# Altium PCB PCB1.PcbDoc
Units mil, origin at the board's own origin, x right, y up, seen from the top; angles counter-clockwise.
Board outline 721 x 1489.64 mil, 2 copper layers (Top Layer, Bottom Layer), stack 60.4 mil thick; 26 components, 39 nets, 134 pads, 50 vias.
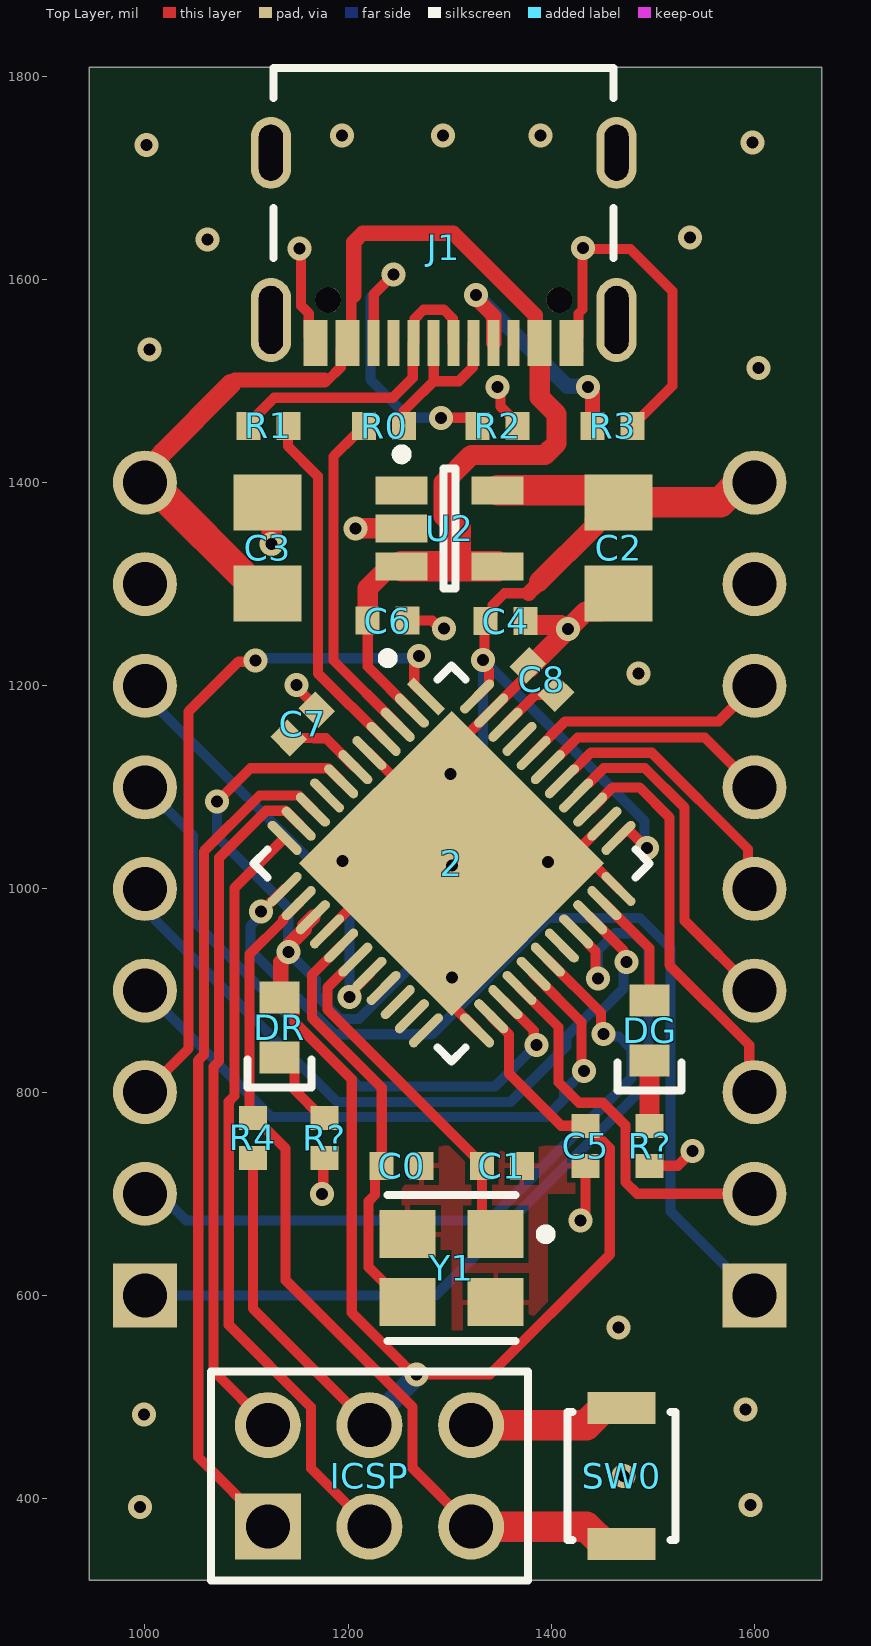
[diagram p0: Top Layer view]
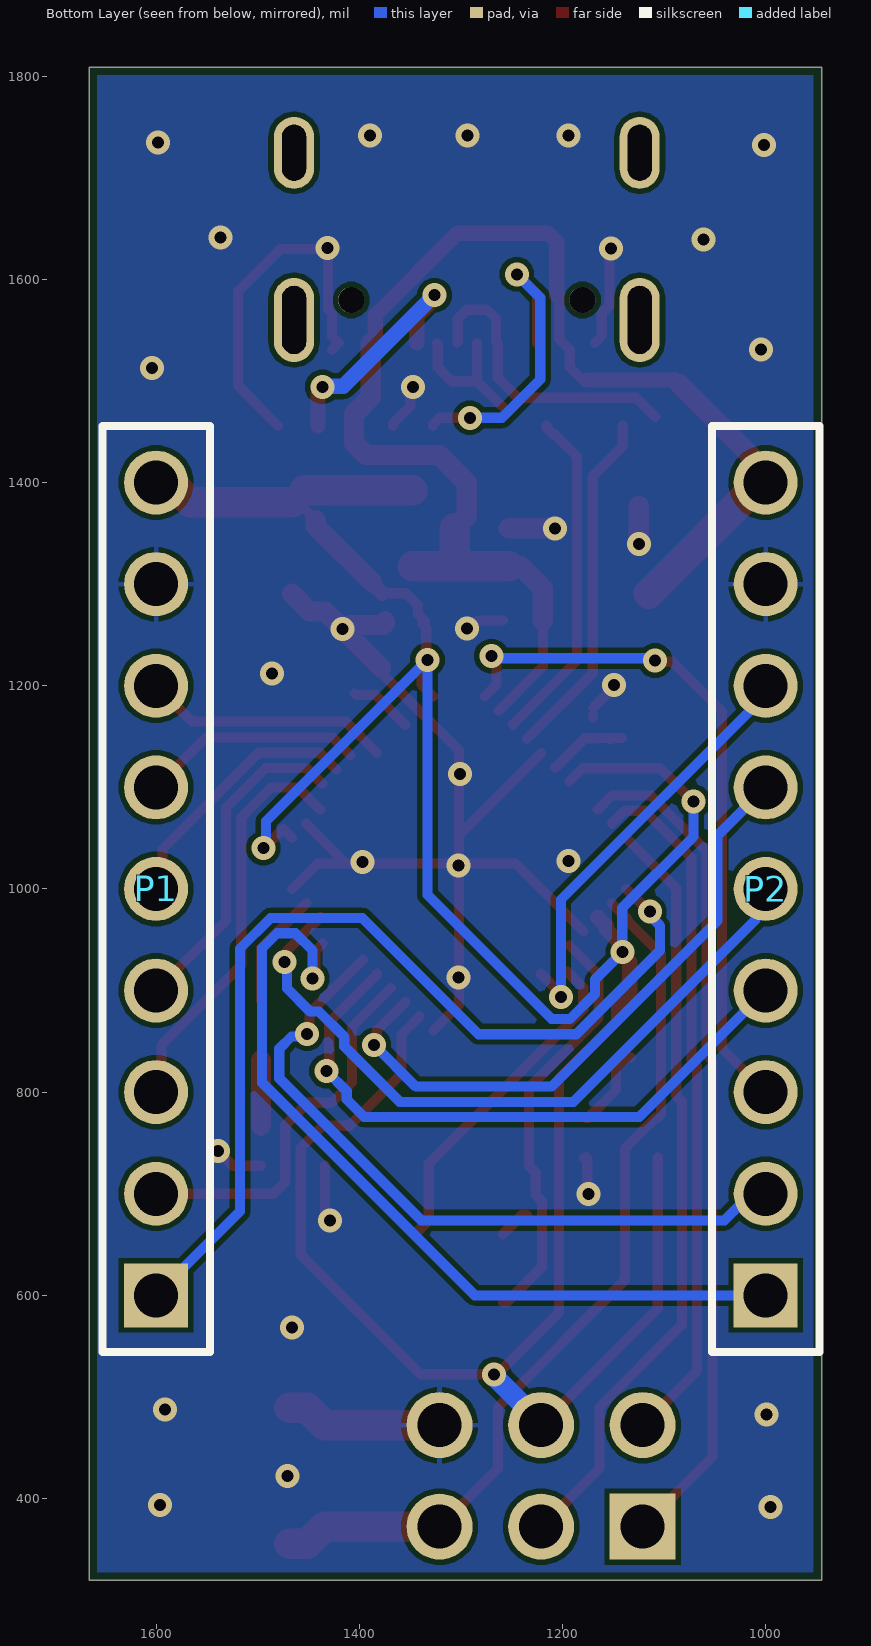
[diagram p1: Bottom Layer view, seen from below]
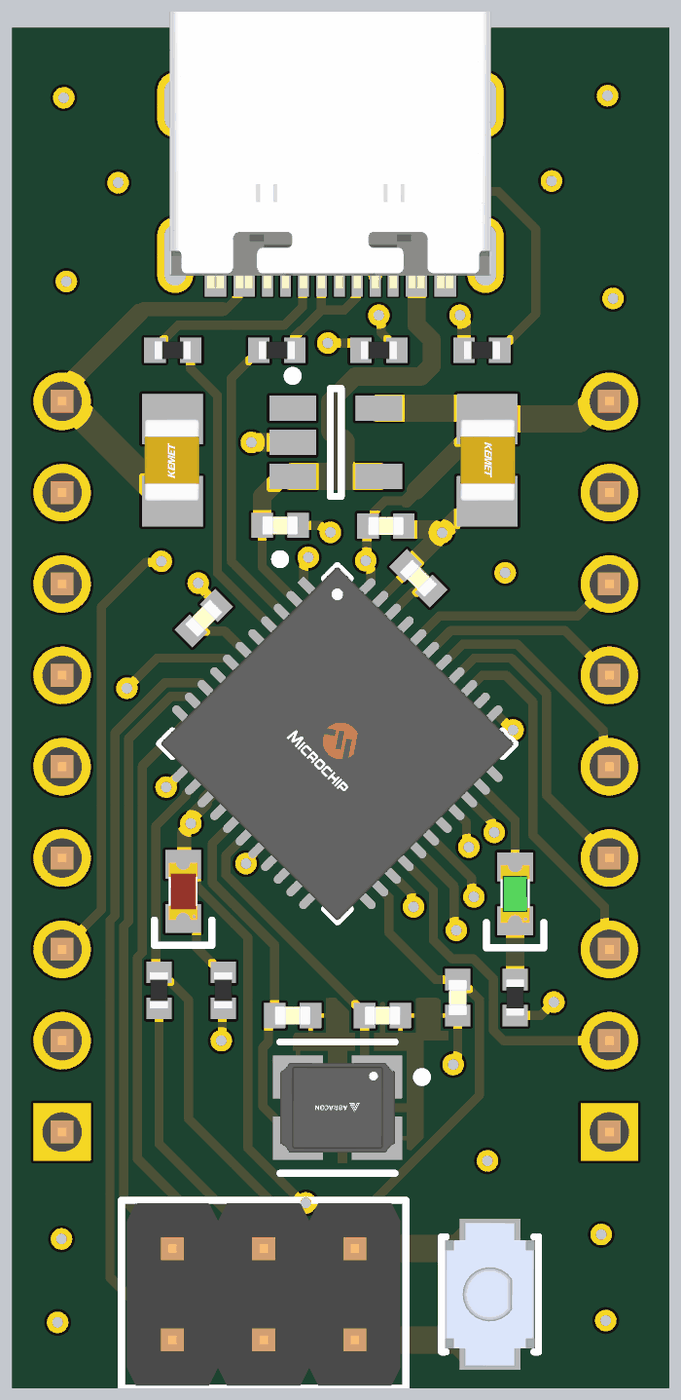
[diagram p2: 3D render of the assembled board from above, using the file's embedded part models]

## Layer stack, top to bottom
Top Solder: solder mask 0.5, Solder Resist, Dk 3.3
Top Layer: signal copper 0.7
Dielectric1: core 59, FR-4, Dk 4.3
Bottom Layer: signal copper 0.7
Bottom Solder: solder mask 0.5, Solder Resist, Dk 3.3

## Board outline
945,319.36 1666,319.36 1666,1809 945,1809

## Design rules (kind name [scope] priority, off if disabled: settings)
BoardOutlineClearance [All] p1: gap=7.87 ignorepadtopadclearanceinfootprint=FALSE
Clearance [All] p1: gap=5 ignorepadtopadclearanceinfootprint=FALSE
ComponentClearance [All] p1: gap=5 collisioncheckmode=3 verticalgap=5 showdistances=TRUE
DiffPairsRouting [All] p1: maxlimit=10 minlimit=5 mostfreqgap=5 toplayer_minwidth=5 toplayer_maxwidth=1000 toplayer_prefwidth=5 bottomlayer_minwidth=5 bottomlayer_maxwidth=1000 bottomlayer_prefwidth=5 maxuncoupledlength=500
Height [All] p1: minheight=0 maxheight=71497.94 prefheight=500
HoleSize [All] p1: absolutevalues=TRUE maxlimit=248.03 minlimit=11.81 maxpercent=80.000 minpercent=20.000
HoleToHoleClearance [All] p1: gap=9.84 allowstackedmicrovias=FALSE
MinimumAnnularRing [All] p1: minimumring=3
MinimumSolderMaskSliver [All] p1: minsoldermaskwidth=0
PlaneClearance [All] p1: clearance=5
PlaneConnect PlaneConnectPowerPads [InPadClass('PowerPads')] p1: planeconnectstyle=Direct reliefexpansion=20 reliefentries=4 reliefconductorwidth=10 reliefairgap=10
PlaneConnect [All] p2: pad.planeconnectstyle=Relief pad.reliefexpansion=11.81 pad.reliefentries=4 pad.reliefconductorwidth=5 pad.reliefairgap=5 via.planeconnectstyle=Direct via.reliefexpansion=11.81 via.reliefentries=4 via.reliefconductorwidth=5 via.reliefairgap=5
PolygonConnect PolygonConnectPowerPads [All vs (InPadClass('PowerPads'))] p1: connectstyle=Direct reliefconductorwidth=10 reliefentries=4 polygonreliefangle="90 Angle" airgapwidth=10
PolygonConnect [All] p2: thpad.connectstyle=Relief thpad.reliefconductorwidth=5 thpad.reliefentries=4 thpad.polygonreliefangle="90 Angle" thpad.airgapwidth=5 smdpad.connectstyle=Relief smdpad.reliefconductorwidth=5 smdpad.reliefentries=4 smdpad.polygonreliefangle="90 Angle" smdpad.airgapwidth=5 via.connectstyle=Direct via.reliefconductorwidth=5 via.reliefentries=4 via.polygonreliefangle="90 Angle" via.airgapwidth=5
RoutingVias [All] p1: holewidth=11.81 width=23.62 viastyle="Through Hole" minholewidth=11.81 minwidth=23.62 maxholewidth=23.62 maxwidth=259.84
SilkToSilkClearance [All] p1: silktosilkclearance=0
SilkToSolderMaskClearance [IsPad] p1: minsilkscreentomaskgap=5 clearancetoexposedcopper=TRUE
SolderMaskExpansion [All] p1: expansion=2.95 istentingtop=FALSE
Width [All] p1: maxlimit=1000 minlimit=10 preferedwidth=10 minimp=50.000000 maximp=50.000000 favimp=50.000000
20 further rules are at their usual default settings.

## Components (designator, comment, footprint, x,y, rotation, side; value= is the part's Value field where it differs from the comment)
2 "ATMEGA32U4RC-MUR" FP-44PW-IPC_A 1301.82,1025.14 r315 top (schematic designator U1)
C0 "22pF" CAP_0402 1252.76,727.5 r180 top
C1 "22pF" CAP_0402 1351.32,727.5 r180 top
C2 "10uF" CAP_0805 1466.16,1335.6 r270 top
C3 "10uF" CAP_0805 1120.87,1335.6 r90 top
C4 "1uF" CAP_0402 1355.03,1263.5 r0 top
C5 ".1uF" CAP_0402 1433.75,747.19 r270 top
C6 "1uF" CAP_0402 1239.01,1264.14 r0 top
C7 "1uF" CAP_0402 1155.33,1162.5 r45 top
C8 ".1uF" CAP_0402 1390.71,1206.25 r135 top
DG "GREEN" LED_0603_GREEN 1496.69,860.81 r90 top
DR "RED" LED_0603_RED 1132.72,863.5 r90 top
ICSP "61300621121" 61300621121 1221.01,422.31 r0 top
J1 "USB4105-GF-A-060" USB4105-GF-A-060 1294.12,1631 r180 top
P1 "61300911121" 61300911121 1600,1000 r90 bottom
P2 "61300911121" 61300911121 1000,1000 r90 bottom
R0 "22" RES_0402 1235.47,1455.91 r180 top
R1 "22" RES_0402 1121.42,1455.91 r0 top
R2 "5.1K" RES_0402 1347.24,1455.91 r0 top
R3 "5.1K" RES_0402 1460.25,1455.91 r0 top
R4 "10k" RES_0402 1106.24,755.06 r90 top
R? "1k" RES_0402 1176.68,755.06 r90 top
R? "1k" RES_0402 1496.69,747.19 r90 top
SW0 "B3U-1000P" FP-B3U-1000P-MFG 1469.14,422.31 r270 top
U2 "LM4120AIM5-5.0/NOPB" MF05A_M 1300,1355 r0 top
Y1 "16Mhz" FP-ABM8G-MFG 1302,626.69 r180 top

## Footprints (in the part's own frame and the unit in brackets; to place one, negate y for a bottom-side part, rotate by r counter-clockwise, add the part's x,y. Pads: shape width x height; smd on the part's side, far side on the other; paste and mask are expansions set on the pad)
61300621121 [mm] "Pin Header, pitch 2.54 mm, THT, Vertical, dual row, 6p"
  rect 1.65x1.65 hole 1.1: 1(-2.54,-1.27)
  round 1.65 hole 1.1: 2(-2.54,1.27) 3(0,-1.27) 4(0,1.27) 5(2.54,-1.27) 6(2.54,1.27)
  silkscreen extent -3.96,-2.62 3.96,2.61, body extent -3.81,-2.54 3.81,2.54, height 8.59
61300911121 [mm] "Pin Header, pitch 2.54 mm, THT, Vertical, single row, 9p"
  rect 1.6x1.6 hole 1.1: 1(-10.16,0)
  round 1.6 hole 1.1: 2(-7.62,0) 3(-5.08,0) 4(-2.54,0) 5(0,0) 6(2.54,0) 7(5.08,0) 8(7.62,0) 9(10.16,0)
  silkscreen extent -11.58,-1.34 11.58,1.35, body extent -11.43,-1.27 11.43,1.27, height 8.57
CAP_0402 [mm]
  rect 0.6x0.7 smd: 1(-0.5,0) 2(0.5,0)
  body extent -0.5,-0.26 0.5,0.26, height 0.37
CAP_0805 [mm]
  rect 1.4x1.7 smd: 1(-1.143,0) 2(1.143,0)
  body extent -1.15,-0.76 1.15,0.79, height 1.01
FP-44PW-IPC_A [mm]
  rect 1.106x0.239 smd paste+0 mask+0: 1(-3.403,2.5)
  rrect100% 1.106x0.239 smd paste+0 mask+0: 2(-3.403,2) 3(-3.403,1.5) 4(-3.403,1) 5(-3.403,0.5) 6(-3.403,0) 7(-3.403,-0.5) 8(-3.403,-1) 9(-3.403,-1.5) 10(-3.403,-2) 11(-3.403,-2.5) 23(3.403,-2.5) 24(3.403,-2) 25(3.403,-1.5) 26(3.403,-1) 27(3.403,-0.5) 28(3.403,0) 29(3.403,0.5) 30(3.403,1) 31(3.403,1.5) 32(3.403,2) 33(3.403,2.5)
  rrect100% 0.239x1.106 smd paste+0 mask+0: 12(-2.5,-3.403) 13(-2,-3.403) 14(-1.5,-3.403) 15(-1,-3.403) 16(-0.5,-3.403) 17(0,-3.403) 18(0.5,-3.403) 19(1,-3.403) 20(1.5,-3.403) 21(2,-3.403) 22(2.5,-3.403) 34(2.5,3.403) 35(2,3.403) 36(1.5,3.403) 37(1,3.403) 38(0.5,3.403) 39(0,3.403) 40(-0.5,3.403) 41(-1,3.403) 42(-1.5,3.403) 43(-2,3.403) 44(-2.5,3.403)
  rect 5.4x5.4 smd paste-1000 mask+0: 45(0,0)
  silkscreen extent -4.88,-3.5 3.5,3.5, body extent -4.46,-4.46 4.46,4.46, height 0.25
FP-ABM8G-MFG [mm]
  rect 1.4x1.2 smd paste+0 mask+0: 1(-1.1,-0.85) 2(1.1,-0.85) 3(1.1,0.85) 4(-1.1,0.85)
  silkscreen extent -2.48,-1.83 1.6,1.82, body extent -1.9,-1.55 1.9,1.55, height 0.25
FP-B3U-1000P-MFG [mm]
  rect 0.8x1.7 smd paste+0 mask+0: 1(-1.7,0) 2(1.7,0)
  silkscreen extent -1.6,-1.35 1.6,1.35, body extent -2.2,-1.45 2.2,1.45, height 0.25
LED_0603_GREEN [mm]
  rect 0.8x1 smd: A(0.75,0) K(-0.75,0)
  silkscreen extent -1.5,-0.8 -0.8,0.8, body extent -0.8,-0.4 0.8,0.4, height 0.6
LED_0603_RED [mm]
  rect 0.8x1 smd: A(0.75,0) K(-0.75,0)
  silkscreen extent -1.5,-0.8 -0.8,0.8, body extent -0.8,-0.4 0.8,0.4, height 0.6
MF05A_M [mm] "SOT23, 5-Leads, Body 2.9x1.6mm, Pitch 0.95mm, Lead Span 2.8mm, IPC Low Density"
  rect 1.3x0.7 smd: 1(-1.2,0.95) 2(-1.2,0) 3(-1.2,-0.95) 4(1.2,-0.95) 5(1.2,0.95)
  silkscreen extent -1.32,-1.5 0.15,1.97, body extent -0.83,-1.49 0.83,1.5, height 1.19
RES_0402 [mm]
  rect 0.6x0.7 smd: 1(-0.5,0) 2(0.5,0)
  body extent -0.5,-0.25 0.5,0.25, height 0.3
USB4105-GF-A-060 [mm]
  rect 0.6x1.15 smd mask+0.05: A1B12(-3.2,2.378) A4B9(-2.4,2.378) B1A12(3.2,2.378) B4A9(2.4,2.378)
  rect 0.3x1.15 smd mask+0.05: A5(-1.25,2.378) A6(-0.25,2.378) A7(0.25,2.378) A8(1.25,2.378) B5(1.75,2.378) B6(0.75,2.378) B7(-0.75,2.378) B8(-1.75,2.378)
  round 0.65 hole 0.65 unplated mask+0.05: MH(-2.89,1.303) MH(2.89,1.303)
  oval 1x1.8 hole 0.6 slot 1.4 at 90 deg: SH(-4.32,-2.377) SH(4.32,-2.377)
  oval 1x2.1 hole 0.6 slot 1.7 at 90 deg: SH(-4.32,1.802) SH(4.32,1.802)
  silkscreen extent -4.25,-4.5 4.25,0.25, body extent -4.47,-4.97 4.47,2.73, height 3.27

## Part data
2: library part CMP-06276-000241-1, "IC MCU 8BIT 32KB FLASH 44VQFN", Case/Package=VQFN, Frequency=16MHz, Max Operating Temperature=85°C, Min Operating Temperature=-40°C, Core Architecture=AVR, Interface=I2C, Memory Size=32KB, Memory Type=FLASH, Number of I/Os=26, Oscillator Type=Internal, Packaging="Tape and Reel", Peripherals="Brown-out Detect/Reset", RoHS Compliant=Yes
C0 C1: library part CAP_0402_10V, "Capacitor SMD 0402 10V"
C2 C3: library part CAP_0805_16V, "Capacitor SMD 0805 16V"
C4 C5 C6 C7 C8: library part CAP_0402_6V3, "Capacitor SMD 0402 6V3"
DG: library part LED_0603_GREEN, "LED 0603 GREEN SMD"
DR: library part LED_0603_RED, "LED 0603 RED SMD"
ICSP: library part CMP-1502-01072-1, "THT Vertical Pin Header WR-PHD, Pitch 2.54 mm, Dual Row, 6 pins", Contact Resistance=20mOhm, Manufacturer="Wurth Elektronik", Operating Temperature=-40to105degC, Rated Current=3A, Withstanding Voltage=500VAC, Working Voltage=250VAC, Datasheet URL=https://katalog.we-online.de/em/datasheet/6130xx21121.pdf, Gender=Male, Manufacturer URL=http://www.we-online.de, Mounting Technology=THT, Orientation=Vertical, Package Reference=61300621121, Packaging=Bag, Part Number=61300621121, Pin Number=6, Pitch=2.54mm, Publisher=WurthElektronik, Row Number=Dual
J1: "USB Connector Type C SMT 12 Pin", Manufacturer=GCT, Manufacturer Part Number=USB4105-GF-A-060
P1 P2: library part CMP-1502-01080-1, "THT Vertical Pin Header WR-PHD, Pitch 2.54 mm, Single Row, 9 pins", Contact Resistance=20mOhm, Manufacturer="Wurth Elektronik", Operating Temperature=-40to105degC, Rated Current=3A, Withstanding Voltage=500VAC, Working Voltage=250VAC, Datasheet URL=https://katalog.we-online.de/em/datasheet/6130xx11121.pdf, Gender=Male, Manufacturer URL=http://www.we-online.de, Mounting Technology=THT, Orientation=Vertical, Package Reference=61300911121, Packaging=Bag, Part Number=61300911121, Pin Number=9, Pitch=2.54mm, Publisher=WurthElektronik, Row Number=Single
R0 R1 R2 R3 R4 R? R?: library part RES_0402, "Resistor SMD 0402"
SW0: library part CMP-2100-03586-2, "SWITCH TACTILE SPST-NO 0.05A 12V", Contact Current Rating=50mA, Contact Resistance=100mR, Insulation Resistance=100MR, Max Operating Temperature=70°C, Max Voltage Rating (DC)=12V, Min Operating Temperature=-25°C, Operating Force=1.5N, Package Quantity=1, Ratings="Dust Proof", Actuator Length=0.4mm, Actuator Type=Standard, Contact Material=Silver, Current Rating=50mA, Depth=2.5mm, Electrical Life=200000Cycles, Height=1.2mm, Illumination Type=Non-Illuminated, Lead Free="Lead Free", Length=4mm, Max Current Rating=50mA, Mechanical Life=200000Cycles, Mount="Surface Mount", Orientation=Straight, Packaging="Tape and Reel", Switch Function=Off-Mom, Switch Travel=0.15mm, Termination=SMD/SMT, Throw Configuration=SPST, Voltage Rating (DC)=12V, Weight=0.000776oz, Width=3mm
U2: library part CMP-0074-00179-2, "Precision Micropower Low Dropout Voltage Reference, 5-pin SOT-23, Pb-Free", Manufacturer="National Semiconductor", PackageTopMarking=R18A*XTT, PowerWise=Y, ComponentLink1Description="LM4120 Datasheet", ComponentLink1URL=http://www.national.com/ds/LM/LM4120.pdf, ComponentLink2Description="LM4120 Web Page", ComponentLink2URL=http://www.national.com/pf/LM/LM4120.html, ComponentLink3Description="MF05A Package Page", ComponentLink3URL=http://www.national.com/packaging/folders/mf05a.html, CompType="Voltage Reference IC", DatasheetVersion=Mar-2005, PackageDescription="Molded SOT-23, .115 x .063 x .040 in Body, 5 Lead, .0375 in Pitch", PackageReference=MF05A, PackageVersion="revD, Aug-2008", PinCount=5, RevisionNote="Component URLs added", RoHS=Y
Y1: library part CMP-27762-006537-2, "Crystal 16MHz ±20ppm (Tol) ±30ppm (Stability) 18pF FUND 80Ω 4-Pin SMD T/R", Case/Package=CSMD, ESR (Equivalent Series Resistance)=80R, Frequency=16MHz, Frequency Stability=30ppm, Frequency Tolerance=20ppm, Load Capacitance=18pF, Max Operating Temperature=85°C, Min Operating Temperature=-40°C, Operating Frequency="16 MHz", Package Quantity=1000, Depth=2.5mm, Height=1mm, Lead Free="Lead Free", Length=3.2mm, Mount="Surface Mount", Number of Pins=4, Packaging="Tape and Reel", Radiation Hardening=No, Series=ABM8G, Series Resistance=80R, Termination=SMD/SMT, Tolerance=20ppm, Width=2.5mm

## Via types
v1: diameter 23.62, hole 11.81, Top Layer to Bottom Layer, 50 vias

## Nets (pads, with @x,y where several pads share a name; then routed paths per layer and width w, separated by ;. In a path a pad name is that pad's centre, name@x,y a point inside that pad or via, vN(x,y) a via of type N, cw(c..) or ccw(c..) an arc to the next point about the centre after c; other vN are vias at no path point)
A0: 2.36 P1.3 | length 404.4
  Top Layer w10: 2.36 1438.73,1078.12 1460.61,1100 1486.73,1100 1516.24,1070.49 1516.24,925.08 1594.82,846.5 1594.82,805.18 P1.3
A1: 2.37 P1.4 | length 325.6
  Top Layer w10: 2.37@1436.46,1103.69 1451.68,1118.91 1492.25,1118.91 1531.24,1079.92 1531.24,968.76 P1.4
A2: 2.38 P1.5 | length 259.1
  Top Layer w10: 2.38@1422.54,1117.61 1438.94,1134.01 1498.99,1134.01 1593.62,1039.38 1593.62,1006.38 P1.5
A3: 2.39 P1.6 | length 218.9
  Top Layer w10: 2.39@1408.62,1131.53 1426.1,1149.01 1550.99,1149.01 P1.6
A4: 2.40 P1.7 | length 244.8
  Top Layer w10: 2.40 1413.76,1164.91 1564.91,1164.91 P1.7
A5: 2.41
D2: 2.19
D3: 2.18 P2.7 | length 420.3
  Top Layer w10: v1(1201.61,893.88) 1201.61,896.67 1221.01,916.07 2.18
  Bottom Layer w10: P2.7 1000,1190.99 1201.42,989.58 1201.42,894.07 v1(1201.61,893.88)
D4: 2.25 P2.6 | length 628.2
  Top Layer w10: 2.25 1382.73,860.72 1382.73,849.1 v1(1385.33,846.5)
  Bottom Layer w10: P2.6 1047.26,1052.73 1047.26,969 1210.78,805.49 1344.32,805.49 v1(1385.33,846.5)
D5: 2.31 P2.5 | length 707.5
  Top Layer w10: 2.31 1471.22,939.26 1471.22,930.73 v1(1473.83,928.12)
  Bottom Layer w10: P2.5 1010.14,989.86 1010.14,969.45 1189.1,790.49 1360.17,790.49 1414.79,845.1 1414.79,854.46 1439.57,879.24 1448.34,879.24 1471.22,902.12 1471.22,925.51 v1(1473.83,928.12)
D6: 2.27 P2.4 | length 623.6
  Top Layer w10: 2.27 1382.64,916.07 1429.63,869.08 1429.63,823.4 v1(1432.24,820.8)
  Bottom Layer w10: P2.4 1124.51,775.49 1395.07,775.49 1412.35,792.77 1412.35,800.91 v1(1432.24,820.8)
D7: 2.1 P2.3 | length 688.6
  Top Layer w10: P2.3 1043.03,843.03 1043.03,1174.78 1091.96,1223.7 1107.65,1223.7 v1(1108.76,1224.81) ; v1(1269.94,1229.2) 1269.94,1225.52 1265.03,1220.6 1265.03,1201.13 2.1
  Bottom Layer w10: v1(1108.76,1224.81) 1110.96,1227.01 1267.74,1227.01 v1(1269.94,1229.2)
D8: 2.28 P2.2 | length 705.8
  Top Layer w10: 2.28 1448.84,878.13 1448.84,860.04 v1(1451.44,857.43)
  Bottom Layer w10: P2.2 1014.34,700 1040.51,673.83 1338.93,673.83 1478.82,813.73 1478.82,842.66 1466.66,854.82 1454.05,854.82 v1(1451.44,857.43)
D9: 2.29
D10: 2.30 P2.1 | length 843.7
  Top Layer w10: 2.30@1436.05,946.18 1443.34,938.88 1443.34,914.46 v1(1445.95,911.86)
  Bottom Layer w10: P2.1 1286.31,600 1495.64,809.33 1495.64,941.87 1481.05,956.46 1462.98,956.46 1445.95,939.44 v1(1445.95,911.86)
D11: 2.12 P1.1 | length 958
  Top Layer w10: v1(1114.08,977.58) 1114.66,977.58 1137.08,1000 2.12
  Bottom Layer w10: v1(1114.08,977.58) 1114.08,973.89 1103.89,963.7 1103.89,939.54 1186.36,857.07 1282.72,857.07 1397.11,971.46 1487.26,971.46 1517.36,941.36 1517.36,682.64 P1.1
D12: 2.26 P1.2 | length 379.8
  Top Layer w10: 2.26 1407.15,864.14 1407.15,809.72 1427.26,789.61 1450.75,789.61 1472.91,767.45 1472.91,711.55 1484.46,700 P1.2
D13: 2.32 DG.A | length 114.2
  Top Layer w10: 2.32 1496.69,941.63 DG.A
D+: 2.4 R1.2 | length 347.2
  Top Layer w10: R1.2@1140.69,1455.91 1140.69,1435.95 1170.26,1406.38 1170.26,1212.38 2.4
D-: 2.3 R0.2 | length 334.1
  Top Layer w10: R0.2 1215.79,1453.94 1208.98,1447.13 1207.01,1447.13 1185.67,1425.79 1185.67,1224.81 2.3
GND: 2.5 2.15 2.23 2.33 2.35 2.43 2.45 C0.1 C1.1 C2.2 C3.2 C4.2 C5.2 C6.2 C7.2 C8.2 ICSP.6 J1.A1B12 J1.B1A12 P1.8 P2.8 R2.2 R3.2 R?.1 SW0.1 U2.2 Y1.2 Y1.4 | length 2054.4
  Top Layer w10: C3.2 C3.2@1124.82,1376.65 ; v1@1149.27,1198.68 C7.2@1169.25,1178.69 ; v1(1152.4,1630.44) 1153.73,1629.11 1153.73,1574.1 1161.32,1566.5 1161.32,1544.21 J1.B1A12 ; C7.2@1169.85,1168.67 C7.2@1169.85,1170.94 ; v1(1174.48,700) 1175.58,701.1 1175.58,734.28 1176.68,735.38 R?.1@1178.64,735.38 ; 2.15 1246.15,1025.14 2.45 ; 2.5 2.45@1301.82,1052.98 ; Y1.2@1235.24,678.78 1240.07,678.78 Y1.2 ; C6.2 1282.94,1264.14 1290.52,1256.56 v1(1294.21,1256.56) ; 2.23 1301.82,885.95 2.45 ; v1(1347.24,1494.18) 1349.85,1491.57 1349.85,1474.95 1366.93,1457.87 R2.2 ; C8.2 1376.79,1211.46 2.43 1301.82,1136.49 2.45@1301.82,1052.98 ; v1(1416.65,1256.11) v1@1418.47,1257.92 ; J1.A1B12@1426.91,1530.59 J1.A1B12 1426.79,1544.08 1426.79,1566.37 1430.69,1570.28 1430.69,1630.44 v1(1431.25,1631) 1432.45,1629.8 1477.87,1629.8 1519.28,1588.39 1519.28,1495.25 R3.2 ; v1(1428.78,673.83) 1428.78,677.52 1433.75,682.49 C5.2 ; 2.35 2.45@1413.18,1025.14 ; 2.33 1441.02,1025.14 2.45@1413.18,1025.14 ; R?.1@1496.69,727.5 1524.49,727.5 v1(1539.17,742.18) ; 2.45 2.45@1301.82,1052.98 ; 2.45 2.45@1413.18,1025.14
  Top Layer w20: v1(1124.82,1339.52) C3.2@1124.82,1376.65 ; v1(1207.48,1355) U2.2 ; C4.2 1374.72,1261.54 1376.53,1259.72 1409.22,1259.72 1414.25,1254.69 1415.67,1256.11 1416.64,1256.11 C8.2@1378.75,1218.21 ; v1@1418.47,1257.92 1433.58,1273.04 1448.6,1273.04 C2.2
  Top Layer w30: ICSP.6 1434.49,472.32 1451.42,489.24 SW0.1
  other v1: 995.08,391.59 1596.08,393.59 1470.88,422.07 999.32,482.9 1591.08,487.84 1466.34,568.44 1302.36,912.64 1302.36,1023.23 1396.78,1026.57 1194.25,1027.59 1301.02,1113.07 1149.27,1200.95 1485.74,1212.3 1604.08,1512.59 1004.64,1531.19 1061.41,1639.34 1536.58,1641.17 1001.82,1732.34 1598.08,1734.59 1194.2,1741.59 1293.56,1741.59 1389.45,1741.59
MISO: 2.11 ICSP.3 | length 758.1
  Top Layer w10: 2.11 1088.03,1000.82 1088.03,796.27 1082.47,790.7 1082.47,570.93 1163.49,489.91 1163.49,429.84 ICSP.3
MOSI: 2.10 ICSP.2 | length 685.8
  Top Layer w10: ICSP.2 1067.47,525.85 1067.47,825.04 1073.03,830.61 1073.03,1030.76 1119.33,1077.06 1138.55,1077.06 2.10
NetC8_1: 2.42 C8.1 | length 62.5
  Top Layer w10: 2.42 1384.11,1190.94 1403.24,1190.94 C8.1
NetDG_K: DG.K R?.2@1496.69,766.87 | length 64.4
  Top Layer w20: R?.2@1496.69,766.87 DG.K
NetDR_K: DR.K R?.2@1176.68,774.75 | length 80.9
  Top Layer w10: DR.K 1136.66,833.98 1147.4,823.23 1147.4,802.05 1174.71,774.75 R?.2@1176.68,774.75
NetJ1_A5: J1.A5 R3.1 | length 242
  Top Layer w15: v1(1325.94,1584.46) 1327.59,1582.81 1327.59,1579.68 1343.33,1563.93 J1.A5 ; v1(1436.25,1494.18) 1436.25,1491.85 1440.56,1487.54 R3.1
  Bottom Layer w15: v1(1325.94,1584.46) 1415.52,1494.87 1435.56,1494.87 v1(1436.25,1494.18)
NetJ1_A6: J1.A6 J1.B6 R1.1 | length 299.1
  Top Layer w10: R1.1@1108.55,1464.69 1127.32,1483.46 1244.02,1483.46 1263.69,1503.13 1263.69,1536.49 1265.5,1538.3 1265.5,1561.3 1274.23,1570.04 1294.33,1570.04 1303.06,1561.3 1303.06,1538.3 J1.A6
NetJ1_A7: J1.A7 J1.B7 R0.1 | length 149.7
  Top Layer w10: R0.1@1254.74,1468.49 1254.74,1470.46 1261.55,1477.27 1261.79,1477.27 1284.28,1499.76 ; J1.A7 1284.28,1499.76 ; J1.B7 1322.74,1536.49 1322.74,1513.49 1309.01,1499.76 1284.28,1499.76
NetJ1_B5: J1.B5 R2.1 | length 313.9
  Top Layer w10: J1.B5 1225.22,1585.26 v1(1244.91,1604.94) ; v1(1291.25,1463.78) 1320.75,1463.78 1327.56,1456.97 R2.1
  Bottom Layer w10: v1(1244.91,1604.94) 1221.88,1581.91 1221.88,1501.39 1259.49,1463.78 v1(1291.25,1463.78)
Raw: 2.2 C3.1 C6.1 J1.A4B9 J1.B4A9 P2.9 U2.3 U2.4 | length 1381.5
  Top Layer w10: P2.9 P2.9@1005.56,1400 ; C3.1@1114.96,1290.6 C3.1 ; 1176.68,1500.96 1180.29,1500.96 1192.82,1513.49 1192.82,1530.59 1203.13,1540.9 1203.13,1581.96 1205.26,1584.08 ; C6.1 1219.32,1219 2.2 ; U2.3@1240.94,1317.6 U2.3
  Top Layer w15: 1084.46,1496.63 1088.79,1500.96 1176.68,1500.96 ; 1205.26,1584.08 1205.63,1584.46 1205.63,1636.68 1214.42,1645.47 1303.45,1645.47 1384.3,1564.62 1384.3,1541.71 J1.A4B9
  Top Layer w20: P2.9 1000,1411.63 1017.4,1429.03 1017.4,1429.57 1084.46,1496.63 ; C6.1 1219.32,1295.98 U2.3@1240.94,1317.6 ; 1305.91,1355 1294.1,1366.81 1294.1,1399.84 1321.39,1427.13 1393.47,1427.13 1405.19,1438.84 1405.19,1467.23 1388.61,1483.81 J1.A4B9
  Top Layer w30: P2.9@1005.56,1400 C3.1@1114.96,1290.6 ; U2.3 1305.91,1317.6 ; 1305.91,1355 1305.91,1317.6 ; U2.4 1305.91,1317.6
RESET: 2.13 ICSP.5 R4.2 SW0.2 | length 880.4
  Top Layer w10: 2.13 1151.41,985.67 1135.89,970.15 1135.89,968.55 1103.03,935.69 1103.03,777.96 R4.2 1108.21,774.75 1138.55,744.41 1138.55,614.85 1263.49,489.91 1263.49,429.84 ICSP.5
  Top Layer w30: ICSP.5 1434.49,372.32 1451.42,355.39 SW0.2
RX: 2.20
SCK: 2.9 ICSP.1 | length 831.2
  Top Layer w10: ICSP.1 1052.47,440.85 1052.47,831.25 1058.03,836.82 1058.03,1036.97 1113.12,1092.06 1151.39,1092.06 2.9
TX: 2.21
UCap: 2.6 C7.1 | length 78.7
  Top Layer w10: C7.1 1151.04,1148.58 1152.43,1147.19 1153.83,1148.58 1166.24,1148.58 1166.5,1148.33 1178.22,1148.33 1206.68,1119.88 2.6
VCC: 2.7 2.14 2.24 2.34 2.44 C2.1 C4.1 C5.1 DR.A ICSP.4 P1.9 R4.1 U2.5 | length 3098.1
  Top Layer w10: v1(1071.01,1085.91) 1103.91,1118.81 1180.31,1118.81 2.7 ; R4.1 1106.25,587.08 ICSP.4 ; DR.A 1133.8,893.03 1136.66,893.03 1147.4,882.28 1147.4,868.87 1203.57,812.7 1203.57,583.03 v1@1264.28,522.32 ; v1(1267.27,522.32) 1339.72,522.32 1457.53,640.13 1457.53,745.06 1435.72,766.87 1409.66,766.87 1358.49,818.04 1358.49,856.71 1340.88,874.32 2.24 ; 2.44 1338.62,1201.13 1338.62,1216.09 1332.87,1221.83 v1(1332.87,1225.52) 1334.11,1226.75 1334.11,1256.89 C4.1@1338.04,1260.81 ; C4.1 1342.16,1270.32 1342.16,1279.21 1354.01,1291.06 1377.75,1291.06 ; C2.1@1437.69,1358.04 1442.69,1363.04 1460.25,1380.6 C2.1 C2.1@1454.35,1392.4 ; 2.34 1474.75,1058.88 1475.16,1058.88 1493.88,1040.16 v1(1494.43,1040.16)
  Top Layer w15: DR.A@1133.8,893.03 1133.8,928.12 1141.1,935.42 v1(1141.1,937.75) 1142.75,939.4 1142.75,946.09 1156.99,960.32 1156.99,963.82 2.14 ; 1377.75,1291.06 1385.33,1298.64 1385.33,1299.78 1387.83,1302.28
  Top Layer w20: 1387.83,1302.28 1442.69,1357.13 C2.1@1442.69,1363.04
  Top Layer w30: U2.5 C2.1@1454.35,1392.4 ; C2.1 1566.26,1380.6 1585.66,1400 P1.9
  Bottom Layer w10: v1(1071.01,1085.91) 1071.01,1051.49 1141.1,981.4 v1(1141.1,937.75) 1168.14,910.72 1168.14,896.5 1192.57,872.07 1210.64,872.07 1332.87,994.3 v1(1332.87,1225.52) 1491.82,1066.57 1491.82,1042.76 v1(1494.43,1040.16) ; ICSP.4 ICSP.4@1221.01,474.18 ; v1@1267.27,520.45 v1(1267.27,522.32)
  Bottom Layer w20: ICSP.4@1221.01,474.18 v1@1267.27,520.45
X1: 2.17 C1.2 Y1.1 | length 333.5
  Top Layer w10: 2.17@1195.23,918.54 1179.61,902.93 1179.61,881.5 1331.64,729.47 1331.64,673.83 Y1.1
X2: 2.16 C0.2 Y1.3 | length 414.8
  Top Layer w10: 2.16 1164.61,915.76 1164.61,872.87 1233.07,804.41 C0.2 1226.33,720.76 1226.33,698.72 1220.24,692.64 1220.24,627.74 1254.76,593.23 Y1.3
pads on no net: 2.8 2.22 J1.A8 J1.B8 J1.MH J1.SH U2.1

## Polygon pours and split planes (outlines as drawn)
GND on Top Layer "GND_L01_P004" (solid, pour order 4): 1252.76,747.19 1252.76,699.94 1252.76,645 1302,645 1302,565.67 1388.61,565.67 1396.6,573.66 1396.6,699.94 1522.28,699.94 1524.25,701.91 1524.25,747.19 1260.63,747.19
GND on Bottom Layer "GND_L02_P003" (solid, pour order 3): 945,1809 945,319.36 1666,319.36 1666,1809

## Text inside footprints (layer, text, board x,y; h text height)
DG: Top Assembly "+" at 1472.74,912.65 h19.68 r90
DR: Top Assembly "+" at 1108.76,915.35 h19.68 r90